# Allegro board Board_V_1_0.brd
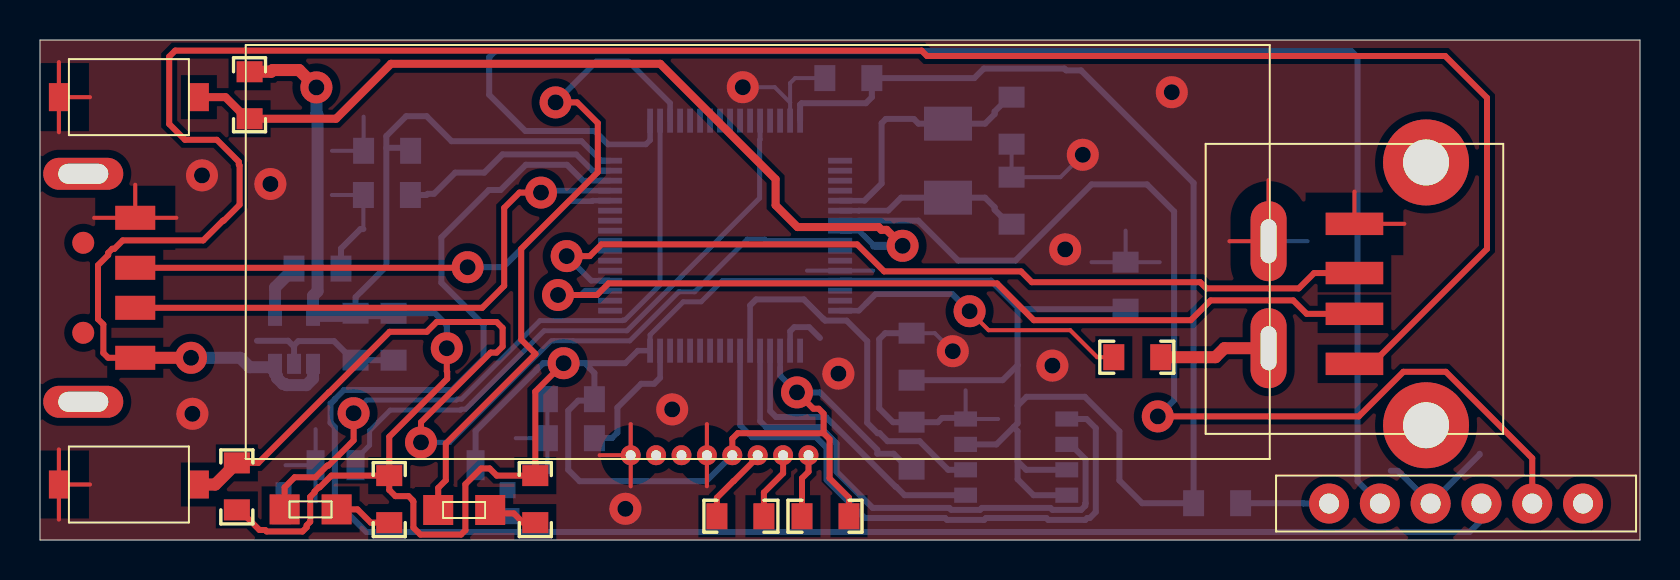
[diagram p0: board, top side]
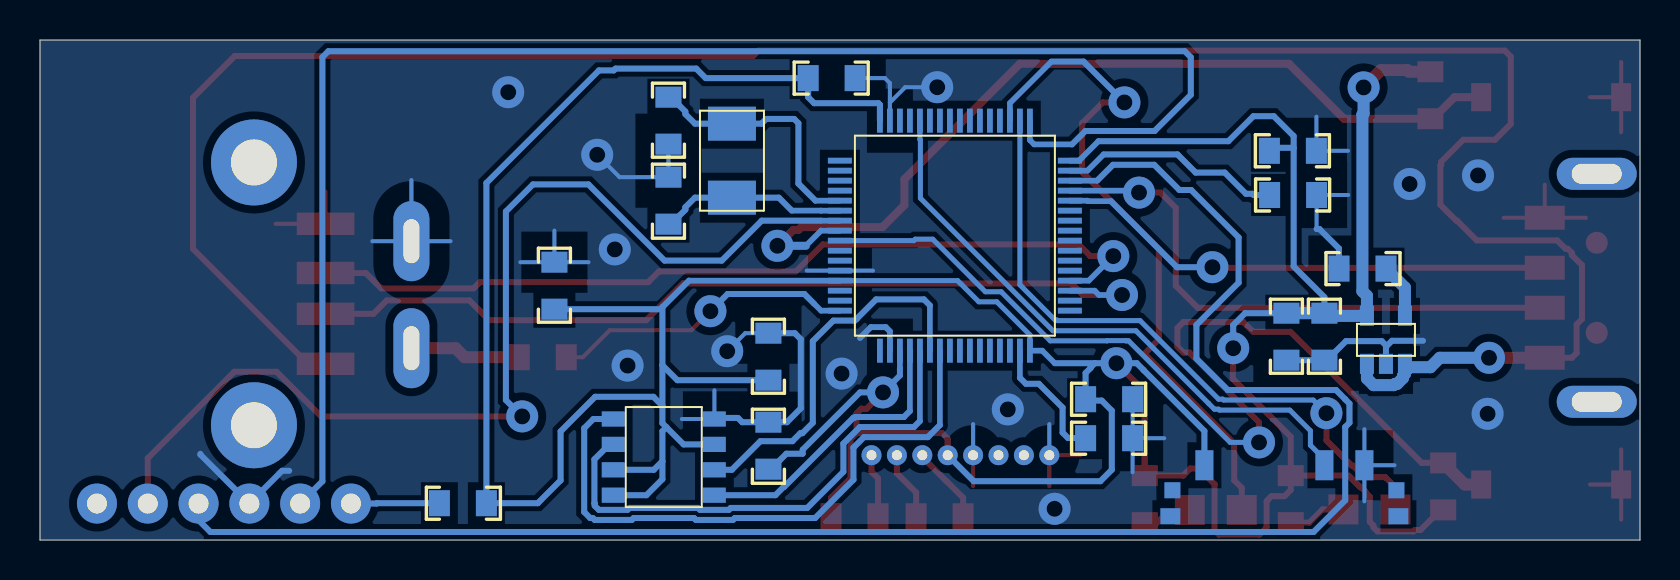
[diagram p1: board, bottom side, seen from below]

Outline 80 x 25 mm; copper layers: TOP, BOTTOM. Coordinates in mm from the lower left corner of the outline.
Outline path: 0,25 0,0 80,0 80,25 0,25

## Placement (name value [footprint] x y rotation side)
C1  C_0805  [0805]  48.58 15.79 90 bottom
C2  C_0805  [0805]  48.58 22.14 270 bottom
C3  C_0805  [0805]  41.59 23.09 180 bottom
C4  C_0805  [0805]  18.52 17.25 180 bottom
C5  C_0805  [0805]  18.53 19.46 180 bottom
C6  C_0805  [0805]  54.28 13.89 270 bottom
C7  C_0805  [0805]  15.78 11.34 270 bottom
C8  C_0805  [0805]  17.68 11.34 270 bottom
C9  C_0805  [0805]  12.7 13.57 0 bottom
C10  C_0805  [0805]  27.72 5.09 180 bottom
C11  C_0805  [0805]  27.72 7.04 180 bottom
C12  C_0805  [0805]  36.19 1.19 180 top
C13  C_0805  [0805]  38.1 1.19 0 top
C14  C_0805  [0805]  43.58 10.34 270 bottom
C15  C_0805  [0805]  43.58 3.54 90 bottom
D1  LED  [KINGBRIGHT_KPJA2107]  21.21 1.5 0 top
D2  LED  [KINGBRIGHT_KPJA2107]  13.53 1.53 0 top
J1  CON6  [PINHEAD_6]  64.45 1.82 90 top
P1  USB_A_FEMALE  [USBFEMALETYPA]  65.72 8.81 180 top
R1  R_0805  [0805]  24.76 0.87 90 top
R2  R_0805  [0805]  17.46 0.87 90 top
R3  R_0805  [0805]  10.48 23.41 270 top
R4  R_0805  [0805]  9.84 1.5 90 top
R5  R_0805  [0805]  57.68 1.84 0 bottom
R6  R_0805  [0805]  53.69 9.14 0 top
SW1  Schalter  [PRGSWITCH]  17.78 1.19 180 bottom
SW2  Taster  [PUSH_BUTTON_KSR221]  4.44 22.14 0 top
SW3  Taster  [PUSH_BUTTON_KSR221]  4.44 2.78 0 top
U1  XTAL  [CRYSTAL]  45.4 18.97 90 bottom
U2  USB_A_MALE  [USBMALETYPA]  4.76 16.11 0 top
U3  <VALUE>  [STM32F205]  40 18.97 180 bottom
U4  MIDAS_LCD  [DISPLAY]  33.98 4.24 270 top
U5  MIC5265  [SOT23-5]  13.65 8.81 90 bottom
U6  S25FL208K  [SOIC8_N]  46.28 2.24 0 bottom

## Library data of the parts
C1-C15 = C_0805
D1 D2 = LED
J1 = CON6
P1 = USB_A_FEMALE
R1-R6 = R_0805
SW1 = Schalter
SW2 SW3 = Taster
U1 = XTAL
U2 = USB_A_MALE
U3 = STM32F205
U4 = MIDAS_LCD_0
U5 = MIC5265
U6 = S25FL208K

## Footprints (pads in the part's own frame, mm; a bottom-side part is the same pattern mirrored in y, then rotated)
0805
  rect 1.05x1.3 smd: 1(0,0) 2(2.35,0)
CRYSTAL
  rect 1.7x2.4 smd: 1(-1.85,0) 2(1.85,0)
DISPLAY
  round 1 hole 0.5: 1(0,4.445) 2(0,3.175) 3(0,1.905) 4(0,0.635) 5(0,-0.635) 6(0,-1.905) 7(0,-3.175) 8(0,-4.445)
  oval 4x1.8 hole 2.2x0.8: A(-5.35,27.45) K(-10.7,27.45)
KINGBRIGHT_KPJA2107
  rect 1.5x1.5 smd: 1(-1.3,0) 2(1.3,0)
PINHEAD_6
  round 2 hole 1 unplated: (0,0) (0,-2.54) (0,-5.08) (0,-7.62) (0,-10.16) (0,-12.7)
PRGSWITCH
  rect 1x0.8 smd: (-5.7,0) (5.7,0)
  rect 0.8x0.8 smd: (-5.6,1.3) (5.6,1.3)
  rect 0.9x1.5 smd: 1(-4,2.55) 2(2,2.55) 3(4,2.55)
PUSH_BUTTON_KSR221
  rect 1x1.4 smd: 1(-3.5,0) 2(3.5,0)
SOIC8_N
  rect 1.143x0.76 smd: 1(0,0) 2(0,-1.27) 3(0,-2.54) 4(0,-3.81) 5(5.06,-3.81) 6(5.06,-2.54) 7(5.06,-1.27) 8(5.06,0)
SOT23-5
  rect 1x0.7 smd: 1(0,0) 2(0,-0.95) 3(0,-1.9) 4(2.4,-1.9) 5(2.4,0)
STM32F205
  rect 1.2x0.29 smd: 1(0,0) 2(0,-0.5) 3(0,-1) 4(0,-1.5) 5(0,-2) 6(0,-2.5) 7(0,-3) 8(0,-3.5) 9(0,-4) 10(0,-4.5) 11(0,-5) 12(0,-5.5) 13(0,-6) 14(0,-6.5) 15(0,-7) 16(0,-7.5) 33(11.5,-7.5) 34(11.5,-7) 35(11.5,-6.5) 36(11.5,-6) 37(11.5,-5.5) 38(11.5,-5) 39(11.5,-4.5) 40(11.5,-4) 41(11.5,-3.5) 42(11.5,-3) 43(11.5,-2.5) 44(11.5,-2) 45(11.5,-1.5) 46(11.5,-1) 47(11.5,-0.5) 48(11.5,0)
  rect 0.29x1.2 smd: 17(2,-9.5) 18(2.5,-9.5) 19(3,-9.5) 20(3.5,-9.5) 21(4,-9.5) 22(4.5,-9.5) 23(5,-9.5) 24(5.5,-9.5) 25(6,-9.5) 26(6.5,-9.5) 27(7,-9.5) 28(7.5,-9.5) 29(8,-9.5) 30(8.5,-9.5) 31(9,-9.5) 32(9.5,-9.5) 49(9.5,2) 50(9,2) 51(8.5,2) 52(8,2) 53(7.5,2) 54(7,2) 55(6.5,2) 56(6,2) 57(5.5,2) 58(5,2) 59(4.5,2) 60(4,2) 61(3.5,2) 62(3,2) 63(2.5,2) 64(2,2)
USBFEMALETYPA
  round 4.3 hole 2.3: (-3.58,3.07) (-3.58,-10.07)
  rect 2.88x1.12 smd: 1(0,0) 2(0,-2.5) 3(0,-4.54) 4(0,-7)
USBMALETYPA
  oval 4x1.6 hole 2.5x1: (-2.6,2.2) (-2.6,-9.2)
  round 1.1 smd: (-2.6,-1.25) (-2.6,-5.75)
  rect 2x1.2 smd: 1(0,-7) 2(0,-4.5) 3(0,-2.5) 4(0,0)

## Nets
3V3: C3.1 C5.1 C6.2 C7.1 C8.1 C11.1 C13.2 C14.2 C15.1 R1.2 R2.2 R3.1 R4.1 R5.1 SW1.1 U3.13(VDDA) U3.19(VDD#19) U3.32(VDD#32) U3.48(VDD#48) U3.64(VDD#64) U4.4(VDD) U5.5(OUT) U6.3(WP#) U6.7(HOLD#) U6.8(VCC)
GND: C1.2 C2.2 C3.2 C4.2 C5.2 C6.1 C7.2 C8.2 C9.2 C10.2 C11.2 C14.1 C15.2 P1.4(-) SW1.3 SW2.1 SW3.1 U2.4(-) U3.12(VSSA) U3.18(VSS#18) U3.63(VSS#63) U4.5(VSS) U4.8(RST) U4.K U5.2(GND) U6.4(GND)
VBAT: U3.1(VBAT)
NRST: U3.7(NRST)
VUSB: P1.1(+) U2.1(+) U5.1(VIN) U5.3(EN)
N05358: C4.1 U3.47(VCAP_2)
N05450: C10.1 U3.31(VCAP_1)
N05685: SW1.2 U3.60(BOOT0)
N05689: U2.2(D-) U3.45(PA12)
N05714: U2.3(D+) U3.44(PA11)
N05739: P1.2(D-) U3.35(PB14)
N05751: P1.3(D+) U3.36(PB15)
N06248: U3.22(PA6) U6.2(SO)
N06281: U3.20(PA4) U6.1(CS#)
N07604: U3.21(PA5) U6.6(SCK)
N07637: U3.23(PA7) U6.5(SI)
N08036: R4.2 SW3.2 U3.9(PC1)
N08040: R3.2 SW2.2 U3.8(PC0)
N08183: C12.2 U4.3(CAP1P)
N08220: C13.1 U4.1(VOUT)
N08493: C12.1 U4.2(CAP1N)
N08729: C1.1 U1.1 U3.6(PH1)
N08747: C2.1 U1.2 U3.5(PH0)
N09420: D2.1(CATHODE) U3.50(PA15)
N09427: D1.1(CATHODE) U3.51(PC10)
N09557: D1.2(ANODE) R1.1
N09564: D2.2(ANODE) R2.1
N10949: R5.2
N11044: U3.49(PA14)
N11071: U3.46(PA13)
N12892: R6.2 U4.A
N12896: R6.1 U3.16(PA2)
N041153: C9.1 U5.4(BYP)

Pads without a net: U3 2 3 4 10 11 14 15 17 24 25 26 27 28 29 30 33 34 37 38 39 40 41 42 43 52 53 54 55 56 57 58 59 61 62; U4 6 7

## Via types
v1: diameter 1.6, hole 0.8, TOP to BOTTOM, 27 vias

## Routing (per net, layer and track width the routed paths; a pad name or vN(x,y) marks a point on that pad's centre or on a via; arc(x,y) is an arc through that point)
3V3: length 235.1
  TOP w0.3: 39.18,5.34 39.18,6.32 38.94,6.56 38.67,6.56 v1(37.85,7.38) ; 39.18,5.34 39.48,5.04 39.48,3.08 40.45,2.11 C13.2 ; 39.18,5.34 34.89,5.34 34.62,5.07 34.62,4.24 ; R4.1 9.97,1.5 10.97,0.5 11.26,0.5 11.33,0.43 13.13,0.43 13.33,0.63 13.33,0.73 13.51,0.91 13.51,2.16 13.73,2.38 13.73,2.43 13.93,2.63 13.98,2.63 14.57,3.22 R2.2 ; R2.2 17.46,5.16 20.36,8.06 20.36,8.42 20.34,8.44 v1(20.34,9.59) ; R2.2 17.46,2.5 17.77,2.19 18.43,2.19 18.64,1.98 18.64,1.95 18.67,1.92 18.67,0.62 19.02,0.27 21.05,0.27 21.27,0.49 21.27,2.79 22.06,3.58 22.48,3.58 22.84,3.22 R1.2 24.76,7.43 v1(26.18,8.84)
  TOP w0.6: R3.1 11.55,23.41 11.64,23.5 12.95,23.5 v1(13.82,22.63)
  BOTTOM w0.25: U3.13 34.12,12.97 33.06,11.91 32.16,11.91 30.5,10.25 U3.32
  BOTTOM w0.28: U3.19 37,8.59 ; 29.26,8.84 29.89,9.47 U3.32 ; U3.13 47.55,12.97 ; 27.08,19.94 28.05,18.97 U3.48
  BOTTOM w0.295: 41.87,4.31 41.87,4.51 39,7.38 v1(37.85,7.38) 37,8.22 37,8.59
  BOTTOM w0.3: 17.32,19.61 18.38,19.61 C5.1 ; 17.32,19.61 17.32,13.68 15.78,12.14 C7.1 ; 17.32,19.61 17.32,20.2 18.31,21.19 19.33,21.19 20.58,19.94 27.08,19.94 ; C14.2 48.13,7.99 48.88,8.74 ; U6.3 47.82,4.78 48.68,5.64 ; 48.68,5.64 48.88,5.84 48.88,6.71 ; 48.68,5.64 48.88,5.44 48.88,3.94 ; 48.88,6.71 48.88,8.74 ; 48.88,6.71 49.33,7.16 52.24,7.16 53.97,5.43 53.97,2.98 55.11,1.84 R5.1 57.68,17.85 52.05,23.48 51.31,23.48 51.22,23.57 47.19,23.57 46.72,23.09 C3.1 41.59,22.14 41.29,21.84 38.08,21.84 38,21.76 U3.64 ; U6.8 49.68,2.24 48.88,3.04 48.88,3.94 ; 41.87,4.31 42.68,4.31 43.45,3.54 C15.1 ; 48.88,3.94 49.31,3.51 U6.7 ; C6.2 48.98,11.54 48.88,11.64 ; 34.62,4.24 33.31,2.94 26.98,2.94 26.41,3.51 26.41,6.47 26.91,6.97 27.65,6.97 C11.1 27.72,8.35 27.47,8.6 27.47,8.63 27.26,8.84 ; v1(20.34,9.59) 20.34,10.74 19.74,11.34 C8.1 ; SW1.1 21.78,5.45 24.82,8.49 24.82,8.5 25.16,8.84 v1(26.18,8.84) 27.26,8.84 ; 48.88,8.74 48.88,11.64 ; 48.88,11.64 47.55,12.97 ; 29.26,8.84 27.26,8.84
  BOTTOM w0.6: v1(13.82,22.63) 13.82,21.33 13.88,21.27 13.88,12.44 13.65,12.21 U5.5 15.55,11.21 15.68,11.34 C7.1 C8.1
GND: length 115.4
  TOP w0.203: 61.43,17.99 U4.K 59.48,14.94 ; 27.98,4.24 U4.8 ; U4.8 29.53,5.79 ; U4.8 29.53,2.69 ; SW2.1 2.5,22.14 ; SW2.1 0.94,23.9 ; SW2.1 0.94,20.39 ; 68.22,15.81 P1.4 65.72,17.42 ; SW3.1 2.5,2.78 ; SW3.1 0.94,1.02 ; SW3.1 0.94,4.53 ; U2.4 4.76,17.76 ; U2.4 2.71,16.11 ; U2.4 6.82,16.11 ; 33.34,5.79 U4.5 33.34,2.69
  BOTTOM w0.203: 37.5,21.87 37.5,22.85 37.75,23.09 C3.2 ; 37.5,21.87 36.74,22.64 v1(35.14,22.64) ; 37.5,21.87 U3.63 ; U4.K 63.38,14.94 ; U4.K 59.48,14.94 ; U4.K 61.43,17.99 ; C14.1 44.74,10.34 v1(45.64,9.44) ; C11.2 C10.2 ; C10.2 23.79,5.09 ; C10.2 25.37,3.39 ; 47.91,6.05 U6.4 46.28,7.48 ; 14.6,19.46 C5.2 16.18,21.16 ; 13.78,1.93 SW1.3 ; SW1.3 13.78,5.54 ; SW1.3 12.28,3.74 ; 38.35,13.47 U3.12 41.66,13.47 ; C6.1 55.98,13.89 ; C6.1 52.58,13.89 ; C6.1 54.28,15.47 ; C2.2 C1.2 51.02,18.14 v1(52.14,19.26) ; U4.8 29.53,5.79 ; U4.5 33.34,5.79 ; 16.17,15.55 C4.2 14.59,17.25
  BOTTOM w0.28: 37.5,10.43 U3.18
  BOTTOM w0.295: 39,10.1 38.46,10.64 37.71,10.64 37.5,10.43
  BOTTOM w0.3: 10.85,9.96 12.4,9.96 12.7,9.66 ; C9.2 15.05,14.57 16.02,15.55 16.17,15.55 ; 12.7,9.66 12.7,9.73 12.91,9.94 14.7,9.94 15.66,8.99 C7.2 C8.2 ; 12.7,9.66 U5.2 ; C14.1 42.26,10.34 41.96,10.04 41.96,6.58 42.65,5.89 C15.2 44.89,5.89 45.1,6.1 46.23,6.1 U6.4 ; 71.98,4.31 71.98,4.27 69.53,1.82 67.89,3.46 67.54,3.46
  vias: v1(7.62,6.31) v1(8.1,18.23) v1(11.52,17.8) v1(29.27,1.56) v1(31.61,6.53) v1(39.92,8.32) v1(50.62,8.72) v1(51.26,14.53) v1(56.59,22.39)
NRST: length 54
  TOP w0.3: v1(55.89,6.18) 65.94,6.18 68.17,8.41 70.29,8.41 74.61,4.09 74.61,1.82
  BOTTOM w0.28: U3.7 40.95,15.97
  BOTTOM w0.3: 40.95,15.97 43.91,15.97 45.91,13.97 48.77,13.97 52.58,17.78 55.35,17.78 56.71,16.42 56.71,7 v1(55.89,6.18)
VUSB: length 118.8
  TOP w0.3: U2.1 3.41,9.11 3.17,9.35 3.17,10.78 2.9,11.04 2.9,13.74 3.41,14.25 3.41,14.36 3.62,14.56 3.72,14.56 4.14,14.98 8.16,14.98 9.15,15.97 9.19,15.97 9.98,16.76 9.98,18.73 9.94,18.77 9.94,18.91 8.84,20.01 7.25,20.01 6.46,20.8 6.46,24.17 6.76,24.47 44.08,24.47 44.35,24.2 70.26,24.2 72.35,22.11 72.35,14.55 66.6,8.81 P1.1
  TOP w0.6: U2.1 v1(7.55,9.11)
  BOTTOM w0.6: U5.1 13.65,8.08 13.32,7.74 12.31,7.74 12.25,7.8 12.14,7.8 11.85,8.1 11.85,8.21 11.75,8.3 U5.3 11.59,8.64 10.48,8.64 10.01,9.11 v1(7.55,9.11)
N05358: length 11.2
  BOTTOM w0.28: 26.82,19.28 27.63,18.47 U3.47
  BOTTOM w0.3: 26.82,19.28 23.12,19.28 22.22,18.37 20.76,18.37 19.7,17.31 19.38,17.31 19.32,17.25 C4.1
N05450: length 6.6
  BOTTOM w0.28: U3.31 31,8.11
  BOTTOM w0.3: 31,8.11 30.7,7.81 30.06,7.81 28.87,6.62 28.87,5.37 28.6,5.1 27.73,5.1 C10.1
N05685: length 30.2
  BOTTOM w0.25: SW1.2 15.78,4.04 16.48,4.74 16.48,5.46 17.51,6.49 21.03,6.49 21.07,6.54 21.28,6.54 21.57,6.83 25.2,10.46 29.35,10.46 35.98,17.09 35.98,20 36,20.02 U3.60
N05689: length 28.5
  TOP w0.3: v1(25.05,17.37) 23.97,17.37 23.21,16.61 23.21,12.71 22.11,11.61 U2.2
  BOTTOM w0.28: U3.45 25.15,17.47
  BOTTOM w0.3: 25.15,17.47 v1(25.05,17.37)
N05714: length 25.1
  TOP w0.3: v1(21.38,13.64) 21.35,13.61 U2.3
  BOTTOM w0.28: U3.44 27.63,16.97 27.6,16.94 26.45,16.94
  BOTTOM w0.3: 26.45,16.94 23.15,13.64 v1(21.38,13.64)
N05739: length 44.2
  TOP w0.3: P1.2 63.33,11.31 62.66,11.98 58.53,11.98 57.54,10.99 49.69,10.99 47.85,12.83 28.43,12.83 27.85,12.25 v1(25.9,12.25)
  BOTTOM w0.28: v1(25.9,12.25) 27.05,12.25 27.27,12.47 U3.35
N05751: length 43.5
  TOP w0.3: P1.3 63.71,13.35 62.94,12.58 58.32,12.58 58.01,12.89 49.59,12.89 49.05,13.43 42.21,13.43 40.86,14.78 28.07,14.78 27.49,14.19 v1(26.34,14.19)
  BOTTOM w0.28: U3.36 27.56,12.97 v1(26.34,14.19)
N06248: length 19.1
  BOTTOM w0.28: U3.22 35.5,11.73
  BOTTOM w0.3: 35.5,11.73 35.8,12.03 38.19,12.03 39.16,11.06 39.17,11.06 39.26,10.97 40.33,10.97 41.36,9.94 41.36,5.86 41.88,5.34 41.98,5.34 42.38,4.94 43.98,4.94 45.41,3.51 U6.2
N06281: length 14.5
  BOTTOM w0.28: U3.20 36.5,6.45
  BOTTOM w0.3: 36.5,6.45 36.81,6.15 39.22,6.15 39.25,6.12 39.33,6.12 42.78,2.66 42.81,2.66 43.23,2.24 U6.1
N07604: length 26.2
  BOTTOM w0.28: U3.21 36,5.95
  BOTTOM w0.3: 36,5.95 36.31,5.65 39.01,5.65 39.83,4.82 39.83,3.41 41.64,1.6 45.47,1.6 45.56,1.51 47,1.51 47.09,1.6 50.53,1.6 50.62,1.51 52.06,1.51 52.26,1.71 52.26,1.82 52.28,1.84 52.28,4.03 51.53,4.78 U6.6
N07637: length 30.5
  BOTTOM w0.28: U3.23 35,5.75
  BOTTOM w0.3: U6.5 52.33,6.05 52.79,5.59 52.79,1.4 52.49,1.1 52.36,1.1 52.27,1 50.41,1 50.32,1.1 47.3,1.1 47.21,1 45.35,1 45.26,1.1 41.24,1.1 39.33,3.01 39.33,4.61 38.8,5.14 35.61,5.14 35,5.75
N08036: length 51.5
  TOP w0.3: R4.2 10.91,3.85 14.44,7.38 14.45,7.38 17.48,10.41 19.34,10.41 19.83,10.9 22.83,10.9 23.13,10.6 23.13,9.67 22.83,9.37 22.53,9.37 19.05,5.89 v1(19.05,4.88)
  TOP w0.6: SW3.2 8.76,2.78 R4.2
  BOTTOM w0.25: v1(19.05,4.88) 20.49,4.88 25.57,9.96 25.7,9.96 25.71,9.97 26.65,9.97 26.66,9.96 29.49,9.96 31.94,12.41 32.73,12.41 35.36,15.04 36.24,15.04 36.31,14.97 U3.9
N08040: length 44.7
  TOP w0.4: v1(43.13,14.71) 42.33,15.51 42.07,15.51 41.93,15.65 37.87,15.65 36.78,16.74 36.78,18.04 31.01,23.81 17.55,23.81 14.8,21.06 R3.2 10.35,21.06 9.27,22.14 SW2.2
  BOTTOM w0.28: 41.71,14.71 40.95,15.47 U3.8
  BOTTOM w0.4: v1(43.13,14.71) 41.71,14.71
N08183: length 3.9
  TOP w0.3: U4.3 35.88,4.15 34.68,2.94 34.67,2.94 33.84,2.11 C12.2
N08220: length 3.2
  TOP w0.3: U4.1 38.42,3.41 38.1,3.09 C13.1
N08493: length 3.5
  TOP w0.3: C12.1 36.19,2.38 37.16,3.34 U4.2
N08729: length 9.5
  BOTTOM w0.28: 42.41,16.47 40.95,16.47 40.95,16.47 U3.6
  BOTTOM w0.3: 42.41,16.47 43.06,17.12 U1.1 47.25,17.12 47.73,16.64 47.73,16.51 48.45,15.79 C1.1
N08747: length 12.8
  BOTTOM w0.28: U3.5 41.23,16.97
  BOTTOM w0.3: 41.23,16.97 42.08,17.82 42.08,20.84 42.29,21.05 43.69,21.05 43.93,20.82 U1.2 47.25,20.82 47.73,21.3 47.73,21.42 48.45,22.14 C2.1
N09420: length 33.1
  TOP w0.3: D2.1 12.23,2.63 12.73,3.14 13.77,3.14 14.36,3.72 14.42,3.72 15.68,4.98 v1(15.68,6.34)
  BOTTOM w0.25: v1(15.68,6.34) 16.34,7 20.82,7 20.86,7.04 21.07,7.04 25,10.97 29.12,10.97 29.15,10.99 29.24,10.99 31,12.76 U3.50
N09427: length 34.1
  TOP w0.3: D1.1 19.91,2.6 20.29,2.98 20.29,4.82 24.77,9.3 24.06,10.02 24.06,14.56 27.89,18.39 27.89,20.85 26.86,21.88 v1(25.78,21.88)
  BOTTOM w0.28: 29.43,23.92 31.5,21.84 U3.51
  BOTTOM w0.3: 29.43,23.92 27.82,23.92 v1(25.78,21.88)
N09557: length 2.5
  TOP w0.3: D1.2 22.68,1.33 23.69,1.33 24.15,0.87 R1.1
N09564: length 2.9
  TOP w0.3: D2.2 15.88,1.53 16.54,0.87 R2.1
N10949: length 4.4
  BOTTOM w0.3: 64.45,1.82 63.18,1.82 63.16,1.84 R5.2
N11044: length 78.5
  BOTTOM w0.28: 28.4,19.78 30.29,19.78 30.5,19.99 U3.49
  BOTTOM w0.3: 66.99,1.82 65.88,2.94 65.88,24.14 65.58,24.44 22.76,24.44 22.46,24.14 22.46,22.26 24.27,20.45 27.73,20.45 28.4,19.78
N11071: length 89.8
  BOTTOM w0.28: 27.13,17.98 27.14,17.97 U3.46
  BOTTOM w0.3: 72.07,1.82 72.07,0.99 71.48,0.4 16.32,0.4 14.74,1.98 14.74,5.65 14.53,5.86 14.53,6.82 14.74,7.03 14.74,7.04 15.2,7.5 20.61,7.5 22.18,9.07 22.18,10.75 20.07,12.86 20.07,15.13 22.44,17.5 23.03,17.5 24.29,18.76 26.35,18.76 27.13,17.98
N12892: length 5.6
  TOP w0.6: R6.2 58.77,9.14 59.22,9.59 U4.A
N12896: length 15.3
  TOP w0.203: R6.1 52.86,9.14 51.51,10.49 47.43,10.49 v1(46.48,11.44)
  BOTTOM w0.28: U3.16 40.95,11.47 41.31,11.83
  BOTTOM w0.3: 41.31,11.83 41.78,12.3 45.62,12.3 v1(46.48,11.44)
N041153: length 2.8
  BOTTOM w0.6: C9.1 11.75,12.62 U5.4

## Copper pours and planes (outline as drawn; the poured copper is in the pictures)
GND on TOP, BOTTOM: 0.01,0.01 0.01,24.99 79.99,24.99 79.99,0.01
